# Altium PCB PCB1.PcbDoc (part 3 of 4)
Units mil, origin at the board's own origin, x right, y up, seen from the top; angles counter-clockwise.
Board outline 7000 x 4400 mil, 4 copper layers (Top Layer, Layer 1, Layer 2, Bottom Layer), stack 23.756 mil thick; 175 components, 152 nets, 661 pads, 40 vias.
Unrouted connection lines stored in the file: 277.
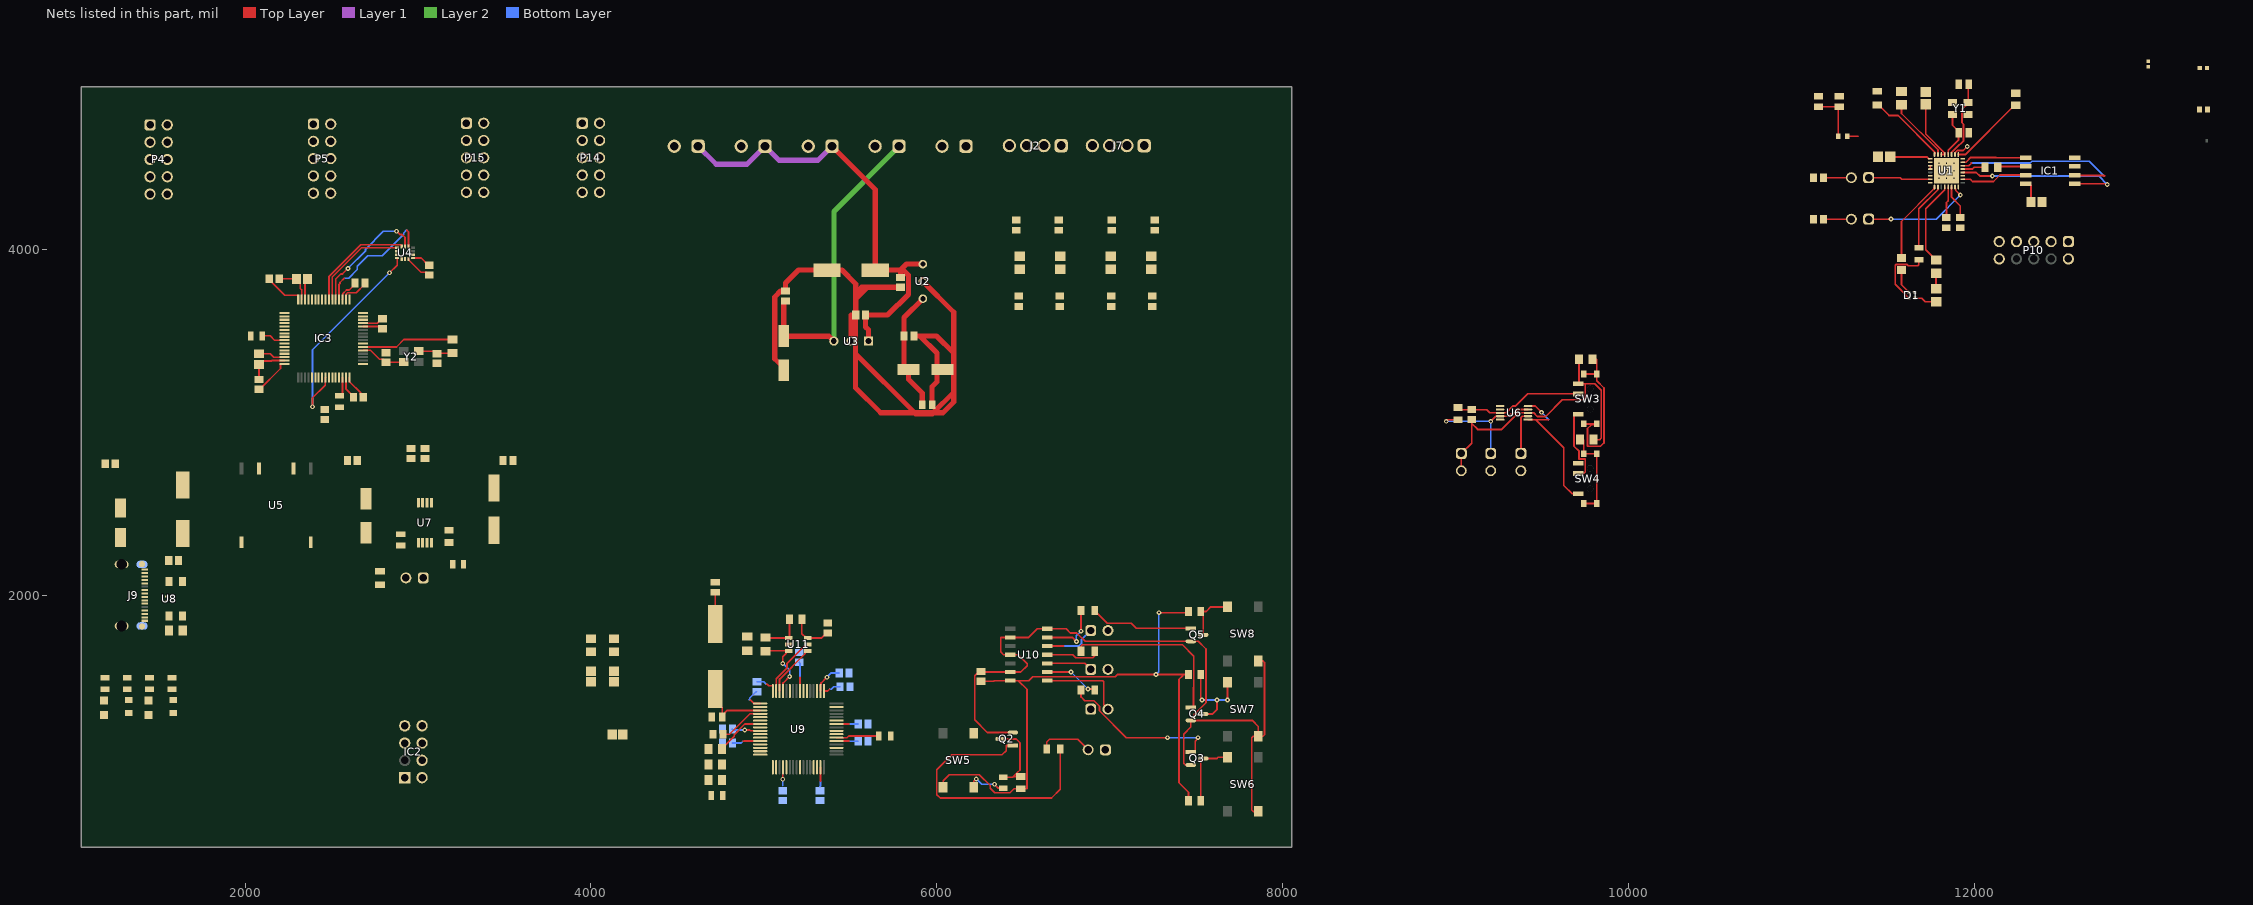
[diagram p4: the nets of this part, all layers, seen from the top]

## Part data (continued)
R12: library part CMP-2001-03692-2, "RES Thick Film, 22Ω, 1%, 0.125W, 100ppm/°C, 0805", Case Code (Imperial)=0805, Case Code (Metric)=2012, Max Operating Temperature=155°C, Max Power Dissipation=125mW, Min Operating Temperature=-55°C, Package Quantity=5000, Resistance=22R, Temperature Coefficient=100ppm/°C, Tolerance=1%, Voltage Rating=150V, Case/Package=0805, Composition="Thick Film", Contact Plating=Tin, Depth=1.25mm, Features="Automotive AEC-Q200", Height=0.45mm, Lead Free="Lead Free", Length=2mm, Military Standard=Not, Mount="Surface Mount", Number of Terminations=2, Packaging="Tape and Reel", Power Rating=125mW, Radiation Hardening=No, Termination=SMD/SMT, Voltage Rating (DC)=150V, Weight=0.000194oz, Width=1.25mm
R13: library part CMP-2001-00211-2, "RES SMD 499 OHM 1% 1/8W 0805", Case Code (Imperial)=0805, Case Code (Metric)=2012, Max Operating Temperature=155°C, Max Power Dissipation=125mW, Min Operating Temperature=-55°C, Package Quantity=1, Resistance=499R, Resistance Tolerance=1%, Resistor Type="Thick Film", Temperature Coefficient=100ppm/°C, Voltage Rating=150V, Case/Package=0805, Construction=Rectangular, Contact Plating=Tin, Depth=1.25mm, Features="Automotive AEC-Q200", Height=0.6mm, Lead Free="Lead Free", Length=2mm, Military Standard=Not, Mount="Surface Mount", Number of Terminations=2, Packaging="Tape and Reel", Power Rating=125mW, Radiation Hardening=No, REACH SVHC="No SVHC", RoHS Compliant=Yes, Series=ERJ, Technology="THICK FILM", Termination=SMD/SMT, Tolerance=1%, Voltage Rating (DC)=150V, Width=0.049inch, Working Voltage=150V
R18 R19 R24 R25: library part CMP-2001-00644-1, Manufacturer=Panasonic, Part Number=ERA6AEB472V
R20 R21 R26 R27: library part CMP-2001-00581-2, "RES 1K OHM 0.1% 1/8W 0805", Case Code (Imperial)=0805, Case Code (Metric)=2012, Max Operating Temperature=155°C, Max Power Dissipation=125mW, Min Operating Temperature=-55°C, Package Quantity=5000, Resistance=1kR, Resistance Tolerance=0.1%, Resistor Type="Thin Film", Temperature Coefficient=25ppm/°C, Voltage Rating=100V, Case/Package=0805, Construction=Rectangular, Contact Plating=Tin, Depth=1.25mm, Height=0.5mm, Length=2mm, Military Standard=Not, Mount="Surface Mount", Number of Pins=2, Number of Terminations=2, Packaging="Tape and Reel", Power Rating=125mW, Radiation Hardening=No, REACH SVHC="No SVHC", RoHS Compliant=Yes, Series=ERA-6A, Technology="THIN FILM", Termination=SMD/SMT, Tolerance=0.1%, Width=1.25mm, Working Voltage=100V
R31 R36 R44 R49 R56 R57 R60: library part CMP-1659-00013-4, "Chip Resistor, 10 KOhm, +/- 1%, 0.125 W, -55 to 155 degC, 0805 (2012 Metric), RoHS, Tape and Reel", Manufacturer=Yageo, Max Operating Temperature="155 degC", Min Operating Temperature="-55 degC", Package Quantity=5000, Voltage Rating="150 V", ComponentLink1Description="Manufacturer URL", ComponentLink1URL=http://www.yageo.com/, ComponentLink2Description=Datasheet, ComponentLink2URL=http://www.yageo.com/documents/recent/PYu-RC_Group_51_RoHS_L_04.pdf, DatasheetVersion="Rev. 4, 02/2016", Height="0.5 mm", Length="2 mm", Mount="Surface Mount", Mounting Technology="Surface Mount", PackageDescription="2-Pin Surface Mounted Device, Body 2 x 1.25 mm", PackageReference=0805, Packaging="Tape and Reel", Pins=2, REACH SVHC="No SVHC", RoHSCompliant=true
R37: library part CMP-2001-03961-1, Manufacturer="Vishay Dale", Part Number=CRCW08054K30FKEA
R38 R45: library part CMP-2000-06961-1, "Chip Resistor, 470 Ohm, +/- 1%, 125 mW, -55 to 155 degC, 0805 (2012 Metric), RoHS, Tape and Reel", Manufacturer=Yageo, Package Description="2-Pin Surface Mounted Device, Body 2 x 1.25 mm", Package Reference=0805, Power Rating=250mW, Resistance=470ohm, Resistance Tolerance=±1%, Resistor Case Style=0805[2012Metric], Resistor Element Type=ThickFilm, Temperature Coefficient=±100ppm/°C, Voltage Rating=150V, Automotive Qualification Standard=-, Datasheet URL=http://www.yageo.com/documents/recent/PYu-RC_Group_51_RoHS_L_7.pdf, Datasheet Version="Rev. 7, 05/2017", Manufacturer URL=http://www.yageo.com/, Mounting Technology=SurfaceMount, MSL=MSL1-Unlimited, Packaging=Tape&Reel, Product Range=-, SVHC=ToBeAdvised
R39 R43: library part CMP-03211-010210-1, "SMD Chip Resistor, Thin Film, 5.11KΩ, 100 V, 0805 [2012 Metric], 100 mW, 0.1%, RN73 Series", Manufacturer="TE Connectivity", Package=RN732A, Power Rating=0.1W, Resistance=5.11KΩ, Temperature="-55°C to 155°C", Temperature Coefficient=10ppm/°C, Temperature Range High=155°C, Temperature Range Low=-55°C, Tolerance=0.1%, Voltage Rating=100V, Automotive=No, Category=Res, ComponentLink2Description=Datasheet, ComponentLink2URL=https://www.te.com/commerce/DocumentDelivery/DDEController?Action=showdoc&DocId=Data+Sheet%7F1773270%7FP%7Fpdf%7FEnglish%7FENG_DS_1773270_P.pdf%7F1676162-2, Composition="Thin Film", Device Class L1="Passive Components", Device Class L2=Resistors, Device Class L3="Chip SMD Resistors", Height=0.65mm, Ipc Land Pattern Name=RESC200125X55, Lead Free=Yes, Manufacturer Part Number=RN73C2A5K11BTDF, Octopart=https://octopart.com/rn73c2a5k11btdf-te+connectivity-41219646, octopart_url=https://octopart.com/rn73c2a5k11btdf-te+connectivity-41219646, Packaging="1000 Reel", RoHS=TRUE, Series=RN73
R40 R41 R47: library part CMP-2100-03673-1, "Chip Resistor, 0 Ohm, Jumper, +/- 5%, 0.125 W, -55 to 155 degC, 0805 (2012 Metric), RoHS, Tape and Reel", Case Code (Imperial)=0805, Case Code (Metric)=2012, Manufacturer=Yageo, Max Operating Temperature=155degC, Min Operating Temperature=-55degC, Package Description="2-Pin Surface Mounted Device, Body 2 x 1.25 mm", Power Rating=125mW, Resistance=0mOhm, Temperature Coefficient=200ppm/degreesC, Tolerance=5%, Voltage Rating=150V, Case/Package=0805, Composition=ThickFilm, Contact Plating=Tin, Datasheet URL=http://www.yageo.com/NewPortal/yageodocoutput?fileName=/pdf/R-Chip/PYu-RC_Group_51_RoHS_L_5.pdf, Datasheet Version="Rev. 5, 10/2016", Depth=1.25mm, Height=0.5mm, Lead Free=LeadFree, Length=2mm, Manufacturer URL=http://www.yageo.com/, Military Standard=Not, Number of Pins=2, Package Reference=0805, Packaging=TapeandReel, Radiation Hardening=No, REACH SVHC=Unknown, RoHSCompliant=true, Termination=SMD/SMT, Voltage Rating (DC)=150V, Width=1.25mm
R42: library part CMP-2001-03615-2, "RES Thick Film, 1.5kΩ, 1%, 0.125W, 100ppm/°C, 0805", Case Code (Imperial)=0805, Case Code (Metric)=2012, Max Operating Temperature=155°C, Max Power Dissipation=125mW, Min Operating Temperature=-55°C, Package Quantity=10, Resistance=1.5kR, Temperature Coefficient=100ppm/°C, Tolerance=1%, Voltage Rating=150V, Case/Package=0805, Composition="Thick Film", Contact Plating=Tin, Depth=1.25mm, Features="Automotive AEC-Q200", Height=0.45mm, Lead Free="Lead Free", Length=2mm, Military Standard=Not, Number of Terminations=2, Packaging="Tape and Reel", Power Rating=125mW, Radiation Hardening=No, Termination=SMD/SMT, Voltage Rating (DC)=150V, Weight=0.000194oz, Width=0.049inch
R46 R50 R58 R61: library part CMP-03211-000756-1, "SMD Chip Resistor, Thin Film, 100Ω, 100 V, 0805 [2012 Metric], 100 mW, 0.1%, RN73 Series", Manufacturer="TE Connectivity", Package=RN732A, Power Rating=0.1W, Resistance=100Ω, Temperature="-55°C to 155°C", Temperature Coefficient=10ppm/°C, Temperature Range High=155°C, Temperature Range Low=-55°C, Tolerance=0.1%, Voltage Rating=100V, Automotive=No, Category=Res, ComponentLink2Description=Datasheet, ComponentLink2URL=https://www.te.com/commerce/DocumentDelivery/DDEController?Action=showdoc&DocId=Data+Sheet%7F1773270%7FP%7Fpdf%7FEnglish%7FENG_DS_1773270_P.pdf%7F1676162-2, Composition="Thin Film", Device Class L1="Passive Components", Device Class L2=Resistors, Device Class L3="Chip SMD Resistors", Height=0.65mm, Ipc Land Pattern Name=RESC200125X55, Lead Free=Yes, Manufacturer Part Number=RN73C2A100RBTDF, Octopart=https://octopart.com/rn73c2a100rbtdf-te+connectivity-41188433, octopart_url=https://octopart.com/rn73c2a100rbtdf-te+connectivity-41188433, Packaging="1000 Reel", RoHS=TRUE, Series=RN73
R51 R52: library part CMP-2100-03670-1, "Chip Resistor, 10 Ohm, +/- 1%, 0.125 W, -55 to 155 degC, 0805 (2012 Metric), RoHS, Tape and Reel", Case Code (Imperial)=0805, Case Code (Metric)=2012, Manufacturer=Yageo, Max Operating Temperature=155degC, Max Power Dissipation=125mW, Min Operating Temperature=-55degC, Package Description="2-Pin Surface Mounted Device, Body 2 x 1.25 mm", Package Quantity=1, Resistance=10Ohm, Temperature Coefficient=200ppm/degreesC, Tolerance=1%, Voltage Rating=150V, Case/Package=0805, Composition=ThickFilm, Datasheet URL=http://www.yageo.com/NewPortal/yageodocoutput?fileName=/pdf/R-Chip/PYu-RC_Group_51_RoHS_L_5.pdf, Datasheet Version="Rev. 5, 10/2016", Depth=1.25mm, Height=0.5mm, Lead Free=LeadFree, Length=2mm, Manufacturer URL=http://www.yageo.com/, Number of Pins=2, Number of Terminations=2, Package Reference=0805, Packaging=TapeandReel, Power Rating=125mW, REACH SVHC=NoSVHC, RoHSCompliant=true, Termination=SMD/SMT, Voltage Rating (DC)=150V, Width=1.25mm
R53: library part CMP-2100-03671-1, "Chip Resistor, 1 KOhm, +/- 1%, 125 mW, -55 to 155 degC, 0805 (2012 Metric), RoHS, Tape and Reel", Case Code (Imperial)=0805, Case Code (Metric)=2012, Manufacturer=Yageo, Max Operating Temperature=155degC, Max Power Dissipation=125mW, Min Operating Temperature=-55degC, Package Description="2-Pin Surface Mounted Device, Body 2 x 1.25 mm", Package Quantity=1, Resistance=1KOhm, Temperature Coefficient=100ppm/degreesC, Tolerance=1%, Voltage Rating=150V, Case/Package=0805, Composition=ThickFilm, Datasheet URL=http://www.yageo.com/NewPortal/yageodocoutput?fileName=/pdf/R-Chip/PYu-RC_Group_51_RoHS_L_5.pdf, Datasheet Version="Rev. 5, 10/2016", Depth=1.25mm, Height=0.024inch, Lead Free=LeadFree, Length=0.079inch, Manufacturer URL=http://www.yageo.com/, Military Standard=Not, Number of Pins=2, Number of Terminations=2, Package Reference=0805, Packaging=TapeandReel, Power Rating=125mW, REACH SVHC=Unknown, RoHSCompliant=true, Termination=SMD/SMT, Voltage Rating (DC)=150V, Width=0.049inch
R55: library part CMP-2001-04934-2, "RES Thick Film, 12kΩ, 1%, 0.125W, 100ppm/°C, 0805", Case Code (Imperial)=0805, Case Code (Metric)=2012, Max Operating Temperature=155°C, Max Power Dissipation=125mW, Min Operating Temperature=-55°C, Package Quantity=10, Resistance=12kR, Temperature Coefficient=100ppm/°C, Tolerance=1%, Voltage Rating=150V, Case/Package=0805, Composition="Thick Film", Contact Plating=Tin, Depth=1.25mm, Features="Automotive AEC-Q200", Height=0.45mm, Lead Free="Lead Free", Length=2mm, Military Standard=Not, Mount="Surface Mount", Number of Terminations=2, Packaging="Tape and Reel", Power Rating=125mW, Radiation Hardening=No, Termination=SMD/SMT, Voltage Rating (DC)=150V, Weight=0.000194oz, Width=0.049inch
R59: library part CMP-2001-01361-1, Manufacturer=Yageo, Part Number=RC0805JR-072KL
R62: library part CMP-009-00007-5, "Chip Resistor, 0 Ohm, 0.125 W, -55 to 155 degC, 0805 (2012 Metric)", Case/Package=0805, Max Operating Temperature=155°C, Min Operating Temperature=-55°C, Power=125mW, Tolerance=5%, Voltage Rating=50V, Mounting Technology=SM, Pins=2, RoHS Compliant=True
SW3 SW4: library part CMP-2000-06884-2, "SWITCH SLIDE SPDT 300MA 6V", Contact Current Rating=300mA, Contact Resistance=70mR, Insulation Resistance=100mR, Max Operating Temperature=85°C, Max Voltage Rating (DC)=6V, Min Operating Temperature=-20°C, Package Quantity=1, Actuator Length=1.5mm, Actuator Material=Nylon, Actuator Type=Standard, Contact Material="Copper Alloy", Contact Plating=Silver, Current Rating=300mA, Depth=5mm, Lead Free="Lead Free", Length=7.7mm, Max Current Rating=300mA, Mechanical Life=10000Cycles, Mount="Surface Mount", Orientation="Right Angle", Packaging="Tape and Reel", REACH SVHC="No SVHC", Switch Function=On-On, Switch Travel=1.5mm, Termination="Gull Wing", Throw Configuration=SPDT, Voltage Rating (AC)=6V, Voltage Rating (DC)=6V, Width=6.7mm
SW5 SW6 SW7 SW8: library part CMP-2000-05160-2, "SWITCH TACTILE SPST-NO 0.05A 12V", Case/Package=SMD/SMT, Color=Black, Contact Resistance=100mR, Current Rating=50mA, Max Operating Temperature=60°C, Max Voltage Rating (DC)=12V, Min Operating Temperature=-20°C, Operating Force=160gf, Package Quantity=1, Actuator Length=0.85mm, Actuator Material=Nylon, Actuator Type=Standard, Contact Material=Silver, Contact Plating=Silver, Depth=9mm, Illumination Type=Non-Illuminated, Lead Free="Lead Free", Length=6mm, Max Current Rating=50mA, Mechanical Life=100000Cycles, Mount="Surface Mount", Orientation=Straight, Packaging="Tape and Reel", REACH SVHC="No SVHC", Switch Function=Off-Mom, Termination="Gull Wing", Throw Configuration=SPST, Voltage Rating (DC)=12V
U1: library part CMP-2000-07453-1, "Low-Power, Highly-Integrated Wi-Fi Solution, 2.5 to 3.6 V, 80 mA, -40 to 125 degC, 32-Pin QFN", Manufacturer="Espressif Systems", Package Description="32-Pin Quad Falt No-Lead, Body 5 x 5 mm, Pitch 0.5 mm", Package Reference=QFN-32, Datasheet URL=http://espressif.com/sites/default/files/documentation/0a-esp8266ex_datasheet_en.pdf, Datasheet Version="Rev. 5.4, 04/2017", Manufacturer URL=http://espressif.com, Mounting Technology=SurfaceMount
U2: library part CMP-2000-05426-2, Case/Package=SIP, Max Input Voltage=36V, Max Input Voltage (DC)=32V, Max Operating Temperature=85°C, Max Output Current=1A, Max Output Power=3.3W, Min Input Voltage=4.75V, Min Input Voltage (DC)=5.5V, Min Operating Temperature=-40°C, Nominal Output Voltage=3.3V, Nominal Supply Current=1mA, Switching Frequency=500kHz, Depth=7.6mm, Efficiency=79%, Height=10.2mm, Isolation=Isolated, Length=11.7mm, Max Supply Voltage=36V, Min Supply Voltage=4.75V, Mount="Through Hole", NexarPartId=9539342, Number of Outputs=1, Number of Pins=3, Output Current=1A, Output Power=3.3W, Output Type=Fixed, Output Voltage=3.3V, Power Rating=3.3W, Radiation Hardening=No, REACH SVHC="No SVHC", RoHS=Compliant, Weight=1.9g, Width=7.6mm
U3: library part CMP-2000-05427-1, "DC/DC converter, 5 VDC, 1000 mA, -40 to 85 degC, 3-Pin SIP, RoHS", Input Voltage DC Max=36V, Input Voltage DC Min=6.5V, Manufacturer=Tracopower, Output Current Max=1A, Output Power Max=5W, Output Voltage Nom.=5V, Package Description="3-Pin Single In-line Package, Body 11.7 x 7.6 mm, Pitch 2.54 mm", Package Reference=SIP-3, Approvals & Standards=IEC,UL, Datasheet URL=https://datasheet.ciiva.com/6815/tsr1-6815641.pdf, Datasheet Version=Jan-15, DC / DC Converter Mounting=ThroughHole, DC / DC Converter Output Type=Fixed, DC / DC Converter Type=SIP, Depth=11.7mm, Height=10.2mm, Manufacturer URL=http://www.tracopower.com/home, No. of Outputs=1Output, Product Range=TSR-1Series, Width=7.6mm
U4: library part CMP-12177-000010-1, "INEMO INERTIAL MODULE: 3D ACCELE", Manufacturer=STMicroelectronics, Max Supply Voltage=3.6V, Min Supply Voltage=1.62V, Operating Supply Current=0.55mA, Package=LGA-14L-DM00249496, Temperature="-40°C to +85°C", Temperature Range High=+85°C, Temperature Range Low=-40°C, Accel Range=2/4/8/16g, Accel Sensitivity=0.061/0.122/0.244/0.488mV/g, Automotive=No, Category=IC, ComponentLink2Description=Datasheet, ComponentLink2URL=https://www.st.com/resource/en/datasheet/lsm6dsox.pdf, Device Class L1=Sensors, Device Class L2="Motion Sensors", Device Class L3="Inertial Measurement Units (IMUs)", Digikey Description="INEMO INERTIAL MODULE: 3D ACCELE", Footprint Url=https://www.st.com/content/ccc/resource/technical/document/technical_note/73/17/9c/16/dd/96/4a/01/CD00134799.pdf/files/CD00134799.pdf/jcr:content/translations/en.CD00134799.pdf, Gyro Range=125/250/500/1000/2000°/s, Gyro Sensitivity=4.375/8.75/17.5/35/70LSB/°/s, Height=0.86mm, Lead Free=Yes, Manufacturer Part Number=LSM6DSOXTR, Mouser Description="LSM6DSOX: 3.6 V 3 Axis Accelerometer Gyroscope iNEMO Inertial Module - LGA-14L", Octopart=https://octopart.com/lsm6dsoxtr-stmicroelectronics-98102600, RoHS=TRUE, Sensor Output=I2C,SPI,Other, Sensor Type=Temperature,Accelerometer,Gyroscope
U5: library part CMP-01539-55433846-1, "TSRN 1-2433SM Non Isolated Board Mount Dc/dc Converter, Surface Mount Dip, 5.5 W, 1.5 V, 5.5 V, 1 A, 4.6 V Rohs Compliant: Yes", Case/Package=SMD/SMT, Max Input Voltage=42V, Max Operating Temperature=85°C, Max Output Current=1A, Max Output Power=5.5W, Max Output Voltage=5.5V, Min Input Voltage=4.6V, Min Operating Temperature=-40°C, Min Output Voltage=1.5V, Output Voltage=3.3V, Depth=15.2mm, Efficiency=80%, Height=7mm, Isolation=Non-Isolated, Length=15.2mm, Max Input Voltage (DC)=42V, Min Input Voltage (DC)=4.6V, Mount="Surface Mount", NexarPartId=55433846, Number of Outputs=1, Number of Pins=6, Output Current=1A, Output Power=5.5W, REACH SVHC="No SVHC", RoHS=Compliant, Weight=1.7kg, Width=9.3mm
U6: library part CMP-04892-000058-1, "IC SWITCH DUAL SPDT 10MSOP", Case/Package=VSSOP, High Level Output Current=50mA, Max Operating Temperature=85°C, Max Supply Current=1uA, Max Supply Voltage=5.5V, Min Operating Temperature=-40°C, Min Supply Voltage=1.8V, On-State Resistance=10R, Package Quantity=1, Bandwidth=220MHz, Contact Plating=Gold, Height=1.02mm, Lead Free="Lead Free", Length=3mm, Low Level Output Current=50mA, Mount="Surface Mount", Number of Bits=2, Number of Channels=2, Number of Inputs=2, Number of Outputs=4, Number of Pins=10, Operating Supply Current=1uA, Packaging="Tape and Reel", Polarity=Non-Inverting, Radiation Hardening=No, Series=-, Supply Type=Single, Throw Configuration=SPDT, Turn-Off Delay Time=3.8ns, Turn-On Delay Time=5.7ns, Weight=0.000663oz, Width=3mm
U7: library part CMP-0339-00043-2, "Dual In / Single Out Autoswitching Power Mux, 2.8 to 5.5 V, -40 to 85 degC, 8-pin TSSOP (PW), Green (RoHS & no Sb/Br)", IN1 Output Current(Max)(A)=1.25, IN1, IN2 Input Voltage(Max)(V)=5.5, IN1, IN2 Input Voltage(Min)(V)=2.8, Manufacturer="Texas Instruments", Code_JEDEC=MO-153, ComponentLink1Description=Datasheet, ComponentLink1URL=http://www.ti.com/general/docs/lit/getliterature.tsp?genericPartNumber=TPS2113A&fileType=pdf, DatasheetVersion=SBVS045C, Eco-Plan="Green (RoHS & no Sb/Br)", IN1 rDS(on)(Typ)(mOhm)=84, IN2 Output Current(Max)(A)=1.25, IN2 rDS(on)(Typ)(Ohms)=0.084, Mounting Technology="Surface Mount", Number of Inputs=2, PackageDescription="8-Pin Plastic Thin Small Outline Package 3 x 4.4 mm Body ,0.65 mm Pitch", PackageReference=PW0008A, PackageVersion="revG, Feb-2011", PartNumber=TPS2113APW, SubFamily="Power Multiplexer (MUX)"
U8: library part CMP-0326-00046-3, "ESD Solution for Super-Speed (6 Gbps) USB 3.0 Interface, 2 Channels, -40 to +85 degC, 3-pin SOT (DRT), Green (Rohs & No Sb/Br)", Breakdown Voltage(Min)(V)=9, Differential Capacitance(pF)=0.01, IO Capacitance(Typ)(pF)=0.7, IO Leakage Current(nA)=10, Manufacturer="Texas Instruments", 1394 / Firewire=TRUE, ComponentLink1Description=Datasheet, ComponentLink1URL=http://www.ti.com/general/docs/lit/getliterature.tsp?genericPartNumber=TPD2EUSB30&fileType=pdf, ComponentLink2Description="URL Link1", ComponentLink2URL=SamplesURL:http://www.ti.com/product/tpd2eusb30#samples, DatasheetVersion=SLVSAC2C, Eco-Plan="Green (RoHS & no Sb/Br)", HDMI=TRUE, IEC 61000-4-2 Air-Gap(+/- kV)=8, IEC 61000-4-2 Contact(+/- kV)=8, Mounting Technology="Surface Mount", PackageDescription="3-Flat Lead Plastic Small Outline, 1 x 1 mm (inc leads), 0.35 mm Pitch", PackageReference=DRT0003A, PackageVersion="revD, Jun-2008", PartNumber=TPD2EUSB30DRTR, Serial ATA / eSATA=TRUE, SubFamily="ESD Solution", USB Full Speed=TRUE, USB High Speed=TRUE, USB Super Speed=TRUE
U9: library part CMP-0078-00023-3, "Dual High Speed USB To Multipurpose UART/FIFO IC, 64-pin LQFP, Tape and Reel", Manufacturer=FTDI, ComponentLink1Description="Manufacturer URL", ComponentLink1URL=http://www.ftdichip.com/, ComponentLink2Description=Datasheet, ComponentLink2URL=http://www.ftdichip.com/Support/Documents/DataSheets/ICs/DS_FT2232H.pdf, DatasheetVersion="ver 2.21, Jun-2012", PackageDescription="64-Pin Thin Quad Flat Pack, 10 x 10 x 1.4 mm Body, 0.5 mm Pitch", PackageReference=LQFP-64, PackageVersion=Jun-12, PartNumber=FT2232HL-Reel, RevisionNote="DatasheetVersion updated to 2.21 Jun-2012"
U10: library part CMP-1615-00149-4, "IC INVERTER SCHMITT 6CH 14SOIC", Manufacturer="TEXAS INSTRUMENTS", Max Supply Voltage=3.6V, Min Supply Voltage=1.65V, Nominal Supply Current=1uA, Package=D0014A, Temperature="-40°C to +125°C", Temperature Range High=+125°C, Temperature Range Low=-40°C, Automotive=No, Category=IC, ComponentLink2Description=Datasheet, ComponentLink2URL=https://www.ti.com/lit/gpn/SN74LVC14A, Device Class L1="Integrated Circuits (ICs)", Device Class L2="Logic ICs", Device Class L3="Logic Gates", Digikey Description="IC INVERTER SCHMITT 6CH 14SOIC", Height=1.75mm, Lead Free=Yes, Logic Function Desc=Inverting, Manufacturer Part Number=SN74LVC14AD, Mouser Description="In a Pack of 10, Texas Instruments SN74LVC14AD, Hex Schmitt Trigger CMOS Inverter, 14-Pin SOIC", Number Of Circuits=6, Number of Inputs=1, Number of Outputs=1, Octopart=https://octopart.com/sn74lvc14ad-texas+instruments-22854, Propagation Delay=3.2ns, RoHS=TRUE, Standoff Height=0.1mm
U11: library part CMP-0162-00356-2, "IC EEPROM 2K SPI 2MHZ SOT23-6", Case/Package=SOT-23, Frequency=2MHz, Max Operating Temperature=85°C, Max Supply Voltage=5.5V, Min Operating Temperature=-40°C, Min Supply Voltage=2.5V, Nominal Supply Current=2mA, Package Quantity=3000, Access Time=250ns, Contact Plating=Tin, Density=2Kb, Height=1.3mm, Interface=Serial, Lead Free="Lead Free", Length=3.1mm, Max Frequency=2MHz, Memory Size=2Kb, Memory Type=EEPROM, Mount="Surface Mount", Number of Pins=6, Packaging="Tape and Reel", Radiation Hardening=No, REACH SVHC="No SVHC", Width=1.8mm
Y1: library part CMP-27762-002739-1, "Crystal 26MHz ±10ppm 10pF SMD-4 3.2mm x 2.5mm", Case/Package=CSMD, ESR (Equivalent Series Resistance)=50R, Frequency=26MHz, Frequency Stability=10ppm, Load Capacitance=10pF, Max Operating Temperature=60°C, Min Operating Temperature=-10°C, Operating Frequency="26 MHz", Package Quantity=1000, Resistor Type=Ceramic, Depth=2.5mm, Frequency Tolerance=10ppm, Height=0.031inch, Lead Free="Lead Free", Length=3.2mm, Mount="Surface Mount", Number of Pins=4, Packaging="Tape and Reel", REACH SVHC="No SVHC", Series=ABM8, Series Resistance=50R, Termination=SMD/SMT, Tolerance=10ppm, Width=2.5mm
Y2: library part CMP-27762-015716-1, "Crystal 24MHz ±20ppm (Tol) ±50ppm (Stability) 12pF FUND 50Ω Automotive 4-Pin Ultra Mini-CSMD T/R", Case/Package=SMD/SMT, ESR (Equivalent Series Resistance)=50R, Frequency=24MHz, Frequency Stability=50ppm, Frequency Tolerance=20ppm, Load Capacitance=12pF, Max Operating Temperature=125°C, Min Operating Temperature=-40°C, Ratings=AEC-Q200, Height=0.031inch, Length=0.126inch, Mount="Surface Mount", Packaging="Cut Tape", RoHS Compliant=Yes, Series=ABM8AIG, Width=0.098inch
Y3: "Crystal or Oscillator", Manufacturer_Name=ABRACON, Mouser Part Number=815-ABLS2-12-B4YT, Datasheet Link=https://abracon.com/Resonators/abls.pdf, Manufacturer_Part_Number=ABLS2-12.000MHZ-B4Y-T, Mouser Price/Stock=https://www.mouser.co.uk/ProductDetail/ABRACON/ABLS2-12000MHZ-B4Y-T?qs=DZ%2FvJMgWWIs6Scm%252BixQ6gw%3D%3D

## Via types
v1: diameter 28, hole 12, Top Layer to Bottom Layer, 30 vias
v2: diameter 19.68, hole 7.87, Top Layer to Bottom Layer, 9 vias
v3: diameter 15, hole 10, Top Layer to Bottom Layer, 1 vias

## Nets (pads, with @x,y where several pads share a name; then routed paths per layer and width w, separated by ;. In a path a pad name is that pad's centre, name@x,y a point inside that pad or via, vN(x,y) a via of type N, cw(c..) or ccw(c..) an arc to the next point about the centre after c; other vN are vias at no path point)
3V3AKKU: C4.1 C11.2 C14.2 C39.2 U2.3 U7.6 | length 718.6
  Top Layer w30: C11.2@5836.57,3305 C11.2@5836,3305 ; C4.1@5916.25,3100.39 5916.25,3169 5836,3249.25 C11.2@5836,3305 ; U2.3@5920,3715 5811.46,3606.46 C14.2@5811.46,3500 5811.46,3400.46 5811,3400 5811,3305 C11.2@5836,3305
3V3BUS: C29.2 C32.2 C38.2 R37.2 U5.5 U7.8 U9.59
5VBUS: C28.2 C30.2 C31.2 C35.2 J9.A4 J9.A9 J9.B4 J9.B9 U5.1
+3V3: C2.1 C5.2 C6.2 C7.1 C8.1 C20.2 C21.2 C22.2 C23.2 C24.2 C27.2 C33.2 C34.2 C37.2 C43.2 C44.2 C45.2 C46.2 C53.2 C54.2 C55.2 D1.1 FB1.1 FB2.1 IC2.1 IC3.1 IC3.13 IC3.19 IC3.32 IC3.48 IC3.64 J8.1 L1.1 P4.1 P4.2 P5.1 P5.2 P10.1 P10.2 P14.9 P14.10 P15.1 P15.2 R4.2 R6.2 R7.2 R8.2 R11.2 R14.2 R15.2 R30.2 R31.2 R32.2 R36.1 R44.2 R49.2 R53.1 R56.2 R57.2 R60.2 SW3.2 SW5.1 U1.1 U1.29 U1.30 U4.5 U4.8 U6.8 U7.7 U9.20 U9.31 U9.42 U9.50 U9.56 U10.14 U11.6 | length 7334.5
  Top Layer w10: C24.2@2080,3191.46 2084.92,3191.46 2205.06,3311.59 2205.06,3336.46 2205.96,3337.36 IC3.48@2229.09,3337.36 ; C23.2@2140,3830 2140,3825.08 2230.14,3734.94 2306.46,3734.94 2307.36,3734.04 IC3.32@2307.36,3710.91 ; IC3.19@2563.27,3710.91 2564.17,3711.81 2564.17,3742.74 2586.38,3764.94 2601.32,3764.94 2636.46,3800.08 C21.2@2636.46,3805 ; IC3.64@2602.64,3259.09 2602.64,3235.96 2667.87,3170.73 2667.87,3160.44 C27.2@2683.54,3144.77 ; IC3.13@2680.91,3573.58 2765.12,3573.58 2790.08,3598.54 C20.2@2795,3598.54 ; U4.8@2970.77,3950.47 3018.15,3950.47 3060.08,3908.54 C22.2@3065,3908.54 ; v1(5109.61,935.59) 5109.61,964.59 5110.68,965.66 5110.68,1004.77 U9.20@5111.02,1005.12 ; U9.56@5209.45,1446.06 5209.53,1446.14 5209.53,1525.51 ; R56.2@5220.04,1860.59 5220.04,1777.83 5244.88,1752.99 U11.6@5254.72,1752.99 5335.63,1752.99 5364.68,1782.05 C55.2@5369.61,1782.05 ; 5327.35,923.33 5329.61,925.59 5327.9,927.29 5327.9,1004.77 U9.31@5327.56,1005.12 ; U9.50@5327.56,1446.06 5327.56,1481.99 5331.34,1485.77 5331.34,1492.32 v1(5364.61,1525.59) ; U9.42@5420.08,1255.12 5420.31,1255.35 5494.37,1255.35 ; SW5.1@6037.01,889.41 6037.01,926.91 6072.01,961.91 6246.59,961.91 6309.31,899.19 6309.31,883.38 6334.78,857.91 6424.02,857.91 6446.59,880.47 R44.2@6485.59,880.47 6522.59,880.47 6522.59,1454.91 6471.59,1505.91 ; C54.2@6255.59,1502.36 6330.05,1502.36 6333.59,1505.91 U10.14@6425.59,1505.91 6471.59,1505.91 ; v1(7284.59,1898.91) 7456.48,1898.91 R60.2@7456.48,1905.91 ; R49.2@7456.48,810.91 7456.48,859.91 7401.59,914.8 7401.59,1512.91 7422.59,1533.91 7422.59,1540.91 ; R57.2@7456.48,1540.91 7422.59,1540.91 ; R31.2@9014.09,3085.32 9021.09,3085.32 9021.09,3073.43 C33.2@9094.09,3073.43 9180.55,3073.43 9199.09,3054.88 U6.8@9258.35,3054.88 9293.1,3054.88 9332.97,3094.75 9347.96,3094.75 9417.62,3164.41 SW3.2@9710.67,3164.41 ; C7.1@11100,4825.45 C8.1@11220,4825.45 11213.92,4819.37 L1.1@11213.92,4654.99 ; C5.2@11515.43,4534.98 11726.69,4534.98 11737.8,4523.88 U1.1@11746.5,4523.88 ; C6.2@11720,4839.55 11720,4667.34 11830.16,4557.19 U1.29@11830.16,4548.48 U1.30@11810.47,4548.48 ; 6471.59,1505.91 6531.59,1505.91 6554.59,1528.91 7031.59,1528.91 7043.59,1540.91 v1(7268.59,1540.91) 7422.59,1540.91
  Bottom Layer w10: 5109.61,899.13 v1(5109.61,935.59) ; C53.2@5204.61,1612.05 5209.61,1607.05 5209.61,1525.59 5209.53,1525.51 ; 5324.61,894.13 5327.35,896.87 5327.35,923.33 ; v1(5364.61,1525.59) 5389.61,1550.59 C46.2@5436.06,1550.59 ; 5494.37,1255.35 5494.61,1255.59 C45.2@5546.06,1255.59 ; v1(7268.59,1540.91) 7284.59,1556.91 v1(7284.59,1898.91)
+5V: C15.2 C17.2 J2.3 J3.1 J7.3 U3.3 | length 1797.9
  Top Layer w30: C17.2@5125,3701.46 5115,3701.46 C15.2@5115,3498.43 5115,3498 5377,3498 U3.3@5405,3470
  Layer 2 w30: U3.3@5405,3470 5405,4220.14 J3.1@5781.67,4596.81
+12V: C12.2 C13.2 C16.2 J4.1 J5.1 J6.1 U2.1 U3.1 | length 2702.6
  Top Layer w30: J5.1@5394.45,4596.81 5645,4346.26 C12.2@5645,3880 ; U3.1@5605,3470 5605,3535 5588.54,3551.46 C16.2@5588.54,3620 5716,3620 5836,3740 5836,3850 5806,3880 5790,3880 ; C12.2@5644.53,3880 C12.2@5645,3880 ; C13.2@5790,3838.54 5790,3880 ; U2.1@5920,3915 5825,3915 5790,3880 ; C12.2@5645,3880 5790,3880
  Layer 1 w30: J6.1@4620,4596.81 4724.81,4492 4902.41,4492 J4.1@5007.22,4596.81 5088.04,4516 5313.64,4516 J5.1@5394.45,4596.81
GND: C1.2 C3.1 C4.2 C5.1 C6.1 C7.2 C8.2 C10.1 C11.1 C12.1 C13.1 C14.1 C15.1 C16.1 C17.1 C18.2 C19.2 C20.1 C21.1 C22.1 C23.1 C24.1 C25.1 C26.1 C27.1 C28.1 C29.1 C30.1 C31.1 C32.1 C33.1 C34.1 C35.1 C36.2 C37.1 C38.1 C39.1 C40.1 C41.1 C42.1 C43.1 C44.1 C45.1 C46.1 C47.2 C48.2 C49.1 C50.1 C52.1 C53.1 C54.1 C55.1 C56.2 C57.2 IC1.4 IC2.8 IC3.12 IC3.18 IC3.31 IC3.47 IC3.63 J2.4 J3.2 J4.2 J5.2 J6.2 J7.4 J8.2 J9.A1 J9.A12 J9.B1 J9.B12 L2.1 P4.9 P4.10 P5.9 P5.10 P7.1 P7.2 P10.9 P10.10 P14.1 P14.2 P15.9 P15.10 Q2.2 Q3.2 Q4.2 Q5.2 R3.1 R5.1 R20.1 R21.1 R26.1 R27.1 R38.1 R39.1 R40.1 R41.1 R42.1 R43.1 R47.2 R55.1 SW3.3 SW6.2 SW7.2 SW8.2 U1.33 U2.2 U3.2 U4.2 U4.3 U4.6 U4.7 U5.7 U5.9 U6.3 U7.2 U7.5 U8.3 U9.1 U9.5 U9.10 U9.11 U9.13 U9.15 U9.25 U9.35 U9.47 U9.51 U10.7 U10.9 U10.11 U10.13 U11.2 Y1.2 Y1.4 | length 12816.2
  Top Layer w10: C24.1@2080,3248.54 C18.2@2080,3333.28 2100.68,3353.96 2152.82,3353.96 2155.91,3357.05 IC3.47@2229.09,3357.05 ; C23.1@2197.09,3830 C19.2@2298.28,3830 2318.96,3809.32 2318.96,3774.23 2327.05,3766.14 IC3.31@2327.05,3710.91 ; IC3.63@2582.95,3259.09 2582.95,3193.19 2626.46,3149.69 C27.1@2626.46,3144.77 ; IC3.18@2582.95,3710.91 2582.95,3734.04 2586.73,3737.82 2586.73,3744.08 2592.59,3749.94 2643.41,3749.94 2693.54,3800.08 C21.1@2693.54,3805 ; IC3.12@2680.91,3553.9 2782.56,3553.9 C20.1@2795,3541.46 ; U4.7@2944.69,3944.07 2944.69,3939.64 3017.21,3867.13 3049.33,3867.13 C22.1@3065,3851.46 ; 4918.05,1392.15 4924.78,1392.15 4943.7,1373.23 U9.1@4979.13,1373.23 ; C54.1@6255.59,1559.45 C54.1@6255.59,1555.91 ; Q2.2@6440.59,1205.91 6292.59,1205.91 6219.59,1278.91 6219.59,1534.91 6240.59,1555.91 C54.1@6255.59,1555.91 ; Q3.2@7469.76,1018.5 7438.59,1018.5 7428.59,1028.5 7428.59,1196.91 7469.76,1238.07 Q4.2@7469.76,1276 Q4.2@7488.59,1276 ; SW6.2@7859.17,749.41 7830.59,749.41 7822.59,757.41 7822.59,1176.41 7830.59,1184.41 SW7.2@7859.17,1184.41 ; SW8.2@7859.17,1619.41 7886.59,1619.41 7895.59,1610.41 7895.59,1192.91 7887.09,1184.41 SW7.2@7859.17,1184.41 ; P7.2@9034.09,2719.88 P7.1@9034.09,2819.88 9094.09,2879.88 9094.09,2992.88 ; C33.1@9094.09,3016.34 9094.09,2992.88 ; SW3.3@9710.67,3223.46 SW3.3@9714.72,3223.46 ; R40.1@9714.72,3364.88 SW3.3@9714.72,3223.46 ; R41.1@9798.46,2899.88 9835.09,2899.88 9844.09,2908.88 9844.09,3184.88 9805.51,3223.46 9751.09,3223.46 ; C54.1@6255.59,1555.91 U10.13@6425.59,1555.91 6486.59,1555.91 6523.59,1592.91 6523.59,1602.91 6470.59,1655.91 U10.11@6425.59,1655.91 6386.59,1655.91 6369.59,1672.91 6369.59,1753.91 6371.59,1755.91 U10.9@6425.59,1755.91 6531.59,1755.91 6581.59,1805.91 U10.7@6638.19,1805.91 6748.59,1805.91 6773.19,1781.31 6810.35,1781.31 6858.16,1733.5 Q5.2@7469.76,1733.5 7512.99,1733.5 7557.59,1688.91 7557.59,1378.91 7488.59,1309.91 Q4.2@7488.59,1276 ; Q4.2@7488.59,1276 7824.07,1276 7859.17,1240.91 SW7.2@7859.17,1184.41 ; 9094.09,2992.88 9128.09,2958.88 9268.09,2958.88 9364.09,3054.88 U6.3@9419.84,3054.88 9453.07,3054.88 9474.07,3033.88 9522.09,3033.88 9618.09,3129.88 9739.09,3129.88 9751.09,3141.88 9751.09,3223.46 ; SW3.3@9714.72,3223.46 9751.09,3223.46
  Top Layer w30: C15.1@5115,3301.57 5115,3316 5063,3368 5063,3725 5096.54,3758.54 C17.1@5125,3758.54 5125,3805 5200,3880 C12.1@5365,3880 5451.46,3880 5531.46,3800 5531.46,3746.91 ; U3.2@5505,3470 5505,3620 C16.1@5531,3620 ; C13.1@5790,3781.46 5600,3781.46 ; C14.1@5868.54,3500 5902,3500 ; U2.2@5920,3815 6098,3637 6098,3400 ; C4.2@5973.51,3100.39 5973.51,3206 6002,3234.49 C11.1@6002,3305 ; C11.1@6033.43,3305 C11.1@6002,3305 ; 5531,3397 5531,3470 C16.1@5531,3620 ; 5531,3397 5873,3055 ; 5531,3397 5531,3200 5676,3055 5873,3055 ; C16.1@5531,3620 C16.1@5531.46,3620 5531.46,3712.91 ; C16.1@5531,3620 5531,3712.46 ; 5531,3712.46 5531.46,3712.91 ; 5531,3712.46 5531,3746.46 5531.46,3746.91 ; 5531.46,3712.91 5600,3781.46 ; 5531.46,3712.91 5531.46,3746.91 ; 5531.46,3746.91 5566,3781.46 5600,3781.46 ; 5873,3055 5979,3055 ; 5873,3055 5878,3050 5974,3050 5979,3055 ; 5902,3500 5998,3500 6098,3400 ; 5902,3500 6002,3400 C11.1@6002,3305 ; 5979,3055 6098,3174 ; 5979,3055 6036,3055 6098,3117 6098,3174 ; 6098,3174 6098,3305 6098,3400
  Bottom Layer w10: 4918.05,1392.15 4914.61,1395.59 4918.05,1399.03 4918.05,1405.41 4954.68,1442.05 C42.1@4959.61,1442.05
  other v2: 11796.69,4411.67 11840,4411.67 11883.31,4411.67 11796.69,4454.98 11840,4454.98 11883.31,4454.98 11796.69,4498.29 11840,4498.29 11883.31,4498.29
NetC1_1: C1.1 U1.27 Y1.3 | length 446.3
  Top Layer w10: U1.27@11868.41,4558.47 11868.41,4559.17 11896.5,4587.26 11897.2,4587.26 11938.86,4628.92 11938.86,4722.64 11929.69,4731.81 11929.69,4810.18 11965.28,4845.77 Y1.3@11965.28,4849.43 11965.28,4951.04 C1.1@11969.21,4954.98
NetC2_2: C2.2 IC1.8 | length 129
  Top Layer w10: IC1.8@12298.27,4379.98 12317.95,4379.98 12328.28,4369.66 C2.2@12328.28,4274.98
NetC3_2: C3.2 U1.28 Y1.1 | length 271.7
  Top Layer w10: U1.28@11849.84,4548.48 11849.92,4548.56 11849.92,4573.17 11910.16,4633.41 C3.2@11910.16,4674.98 11910.16,4682.85 11874.72,4718.29 Y1.1@11874.72,4780.53
NetC9_1: C9.1 C10.2
NetC9_2: C9.2 L2.2 U1.2
NetC18_1: C18.1 IC3.46 | length 157.4
  Top Layer w10: C18.1@2080,3396.72 2144.82,3396.72 2164.81,3376.73 IC3.46@2229.09,3376.73
NetC19_1: C19.1 IC3.30 | length 125.3
  Top Layer w10: IC3.30@2346.73,3710.91 2346.73,3815.01 C19.1@2361.72,3830
NetC25_2: C25.2 IC3.5 Y2.1 | length 264.7
  Top Layer w10: IC3.5@2680.91,3416.1 2724.94,3416.1 2776.95,3364.1 2798.35,3364.1 C25.2@2815,3347.44 2915.63,3347.44 Y2.1@2916.69,3348.5
NetC26_2: C26.2 R62.1 Y2.3 | length 202.1
  Top Layer w10: Y2.3@3003.31,3411.5 3096.06,3411.5 3107.56,3400 3200,3400 R62.1@3200,3400.63
NetC36_1: C36.1 C49.2 FB1.2 U9.9 | length 165.1
  Top Layer w10: v1(4889.61,1220.59) 4918.61,1220.59 4923.1,1216.09 4978.79,1216.09 U9.9@4979.13,1215.75
  Bottom Layer w10: C49.2@4818.15,1225.59 4823.15,1220.59 v1(4889.61,1220.59)
NetC47_1: C47.1 C50.2 FB2.2 U9.4 | length 265.1
  Top Layer w10: C50.2@4763.15,1195.59 4801.72,1195.59 4920.31,1314.17 U9.4@4979.13,1314.17
NetC56_1: C56.1 U9.2 Y3.1 | length 183.5
  Top Layer w10: Y3.1@4719.61,1832.6 C56.1@4719.61,2016.06
NetC57_1: C57.1 U9.3 Y3.2 | length 412
  Top Layer w10: Y3.2@4719.61,1458.58 4719.61,1389.68 4759.13,1350.16 C57.1@4759.13,1303.46 ; C57.1@4759.13,1295.59 C57.1@4759.13,1303.46 ; U9.3@4979.13,1333.86 4789.53,1333.86 C57.1@4759.13,1303.46
NetD1_2: D1.2 R9.1 | length 131.8
  Top Layer w10: D1.2@11656.73,3718.26 11696.37,3718.26 11717.04,3697.59 R9.1@11780,3697.59
NetD1_3: D1.3 R12.1 | length 398.4
  Top Layer w10: D1.3@11623.27,3718.26 11543.19,3798.34 11543.19,3907.38 11549.04,3913.24 11610.96,3913.24 11619.44,3904.76 11674.14,3904.76 11680,3910.62 R12.1@11680,3941.49
NetD1_4: D1.4 R13.1 | length 146.7
  Top Layer w10: R13.1@11580,3880.51 11580,3794.99 D1.4@11623.27,3751.72
NetD2_1: D2.1 U9.29
NetD2_2: D2.2 R14.1
NetD3_1: D3.1 U9.54
NetD3_2: D3.2 R32.1
NetDS1_1: DS1.1 R11.1
NetDS1_2: DS1.2 U9.30
NetDS2_1: DS2.1 R15.1
NetDS2_2: DS2.2 U9.55
NetIC1_1: IC1.1 U1.20 | length 1055.9
  Top Layer w10: U1.20@11933.5,4445.14 12011.67,4445.14 12031.82,4424.99 v1(12105,4424.99) ; IC1.1@12581.73,4379.98 12761.22,4379.98 12766.21,4374.99 v1(12770,4374.99)
  Bottom Layer w10: v1(12105,4424.99) 12720,4424.99 v1(12770,4374.99)
NetIC1_2: IC1.2 U1.22 | length 1042.6
  Top Layer w10: U1.22@11933.5,4484.51 11969.64,4484.51 11985.13,4500 ; IC1.2@12581.73,4429.98 12584.23,4427.49 12752.5,4427.49 12755,4424.99 12750,4424.99
  Bottom Layer w10: 11985.13,4500 12324.94,4500 12334.93,4509.99 12665,4509.99 12750,4424.99
NetIC1_3: IC1.3 U1.19
NetIC1_5: IC1.5 U1.23 | length 377.1
  Top Layer w10: U1.23@11933.5,4504.19 11933.58,4504.27 11953.17,4504.27 11980.89,4531.99 12124.83,4531.99 12126.84,4529.98 IC1.5@12298.27,4529.98
NetIC1_6: IC1.6 R2.1 | length 163.9
  Top Layer w10: R2.1@12136.42,4474.98 12141.42,4479.98 IC1.6@12298.27,4479.98
NetIC1_7: IC1.7 U1.18 | length 385.4
  Top Layer w10: U1.18@11933.5,4405.77 11978.11,4405.77 11990.89,4392.99 12112.34,4392.99 12149.33,4429.98 IC1.7@12298.27,4429.98
NetIC2_3: IC2.3 P2.1 Q5.3 R60.1 SW8.3 U1.7 | length 667
  Top Layer w10: Q5.3@7541.42,1770.91 7541.59,1770.91 7541.59,1891.67 R60.1@7527.35,1905.91 7558.09,1905.91 7584.59,1932.4 SW8.3@7682.01,1932.4 ; P2.1@11390,4414.98 11572.13,4414.98 11581.34,4405.77 U1.7@11746.5,4405.77
NetIC2_4: IC2.4 R1.1 U6.6
NetIC2_5: IC2.5 U1.26 U6.10 | length 96.1
  Top Layer w10: U1.26@11889.21,4548.48 11889.21,4557.19 11893.98,4561.95 11893.98,4563.52 11902.72,4572.26 11937.27,4572.26 v1(11960,4594.99)
NetIC2_6: IC2.6 P3.1 Q4.3 R57.1 SW7.3 U1.15 | length 1194.6
  Top Layer w10: R57.1@7527.35,1540.91 7527.35,1400.15 v1(7533.59,1393.91) ; Q4.3@7541.42,1313.41 7597.09,1313.41 7620.59,1336.91 v1(7620.59,1393.91) ; v1(7682.01,1393.91) SW7.3@7682.01,1497.4 ; P3.1@11390,4174.98 v1(11520,4174.98) ; U1.15@11889.21,4361.48 11889.21,4352.78 11893.98,4348.01 11893.98,4341 v1(11920,4314.98)
  Bottom Layer w10: v1(7533.59,1393.91) v1(7620.59,1393.91) v1(7682.01,1393.91) ; v1(11520,4174.98) 11780,4174.98 v1(11920,4314.98)
NetIC2_7: IC2.7 R4.1 U1.14 | length 197.9
  Top Layer w10: U1.14@11869.53,4361.48 11869.53,4301.22 11920,4250.75 R4.1@11920,4184.51
NetIC3_6: IC3.6 R62.2 | length 537.1
  Top Layer w10: IC3.6@2680.91,3435.79 2875.66,3435.79 2919.24,3479.37 R62.2@3200,3479.37
NetIC3_7: IC3.7 P15.3
NetIC3_14: IC3.14 P5.7
NetIC3_15: IC3.15 P5.8
NetIC3_16: IC3.16 P15.7
NetIC3_17: IC3.17 P15.4
NetIC3_20: IC3.20 U4.12 | length 729.4
  Top Layer w10: IC3.20@2543.58,3710.91 2543.58,3798.58 2548.46,3803.46 2548.46,3808.46 2573.44,3833.44 ; 2935,4112.82 2935,4111.21 2944.69,4101.53 U4.12@2944.69,4015.93
  Bottom Layer w10: 2573.44,3833.44 2598.44,3833.44 2648.64,3883.64 2648.64,3903.64 2708.83,3963.83 2793.83,3963.83 2917,4087 2917,4094.82 2935,4112.82
NetIC3_21: IC3.21 U4.13 | length 707.9
  Top Layer w10: IC3.21@2523.9,3710.91 2523.9,3828.9 2552.73,3857.73 2562.73,3857.73 v1(2595,3890) ; v1(2875,4105) 2877.57,4105 2896.79,4085.78 2909.22,4085.78 2925,4070 U4.13@2925,4015.93
  Bottom Layer w10: v1(2595,3890) 2696.72,3991.72 2696.72,4001.72 2800,4105 v1(2875,4105)
NetIC3_22: IC3.22 U4.1 | length 574.5
  Top Layer w10: IC3.22@2504.21,3710.91 2504.21,3840.32 2673.42,4009.53 U4.1@2879.23,4009.53
NetIC3_23: IC3.23 U4.14 | length 635.1
  Top Layer w10: IC3.23@2484.53,3710.91 2484.53,3841.85 2669.09,4026.42 2899.25,4026.42 2905.32,4020.36 U4.14@2905.32,4015.93
NetIC3_24: IC3.24 R16.1 R18.2
NetIC3_25: IC3.25 R17.1 R19.2
NetIC3_26: IC3.26 P15.8
NetIC3_27: IC3.27 P15.6
NetIC3_28: IC3.28 R22.1 R24.2
NetIC3_29: IC3.29 R23.1 R25.2
NetIC3_33: IC3.33 P4.5
NetIC3_34: IC3.34 P4.7
NetIC3_35: IC3.35 P4.6
NetIC3_36: IC3.36 P4.8
NetIC3_37: IC3.37 P14.7
NetIC3_38: IC3.38 P14.8
NetIC3_39: IC3.39 P4.4
NetIC3_40: IC3.40 P4.3
NetIC3_41: IC3.41 R29.1 | length 140.9
  Top Layer w10: R29.1@2098.5,3500 2145.25,3500 2170.09,3475.16 IC3.41@2229.09,3475.16
NetIC3_42: IC3.42 R48.2
NetIC3_43: IC3.43 P14.3
NetIC3_44: IC3.44 P14.6
NetIC3_45: IC3.45 P14.4
NetIC3_53: IC3.53 P5.6
NetIC3_54: IC3.54 P5.4
NetIC3_55: IC3.55 P14.5
NetIC3_56: IC3.56 U4.9
NetIC3_57: IC3.57 U4.4 | length 1263.2
  Top Layer w10: v1(2390,3090) 2390,3141.08 2463.98,3215.06 2463.98,3258.23 IC3.57@2464.84,3259.09 ; v1(2835,3865) 2879.23,3909.23 U4.4@2879.23,3950.47
  Bottom Layer w10: v1(2390,3090) 2390,3420 v1(2835,3865)
NetIC3_58: IC3.58 P5.3
NetIC3_59: IC3.59 P5.5
NetIC3_60: IC3.60 P15.5 SW5.4
NetIC3_61: IC3.61 R30.1 U6.7 | length 1.3
  Top Layer w10: IC3.61@2542.68,3258.19 IC3.61@2543.58,3259.09
NetIC3_62: IC3.62 R28.1 | length 117.5
  Top Layer w10: R28.1@2545,3153.5 2552.39,3153.5 2563.27,3164.37 IC3.62@2563.27,3259.09
NetJ2_1: J2.1 R16.2
NetJ2_2: J2.2 R17.2
NetJ7_1: J7.1 R22.2
NetJ7_2: J7.2 R23.2
NetJ9_1: J9.1 J9.2 J9.3 J9.4 R47.1
NetJ9_A5: J9.A5 R39.2
NetJ9_A6: J9.A6 J9.B6 R52.1 U8.1
NetJ9_A7: J9.A7 J9.B7 R51.1 U8.2
NetJ9_B5: J9.B5 R43.2
NetL1_2: L1.2 U1.3 U1.4 | length 82.5
  Top Layer w10: L1.2@11266.08,4654.99 11328.89,4654.99 ; U1.4@11746.5,4464.82 U1.3@11746.5,4484.51
NetP1_1: P1.1 U6.2 | length 251.4
  Top Layer w10: P1.1@9379.09,2819.88 9379.09,3027.2 9387.09,3035.2 U6.2@9419.84,3035.2
NetP1_2: P1.2 R54.2
NetP2_2: P2.2 R6.1 | length 160.5
  Top Layer w10: R6.1@11129.53,4414.98 P2.2@11290,4414.98
NetP3_2: P3.2 R7.1 | length 160.5
  Top Layer w10: R7.1@11129.53,4174.98 P3.2@11290,4174.98
NetP6_1: P6.1 R28.2 R31.1 U6.4 U6.9 | length 757.7
  Top Layer w10: v1(8947.09,3005.88) 8955.66,3014.45 R31.1@9014.09,3014.45 ; v1(9204.09,3005.88) 9233.41,3035.2 U6.9@9258.35,3035.2 9308.09,3035.2 9322.78,3049.88 9336.09,3049.88 9360.78,3074.57 U6.4@9419.84,3074.57
  Bottom Layer w10: v1(8947.09,3005.88) v1(9204.09,3005.88) P6.1@9204.09,2819.88
NetP6_2: P6.2 U9.39
NetP8_1: P8.1 U9.18
NetP8_2: P8.2 R46.1 | length 311.3
  Top Layer w10: R46.1@6636.22,1110.91 6636.22,1150.91 6652.22,1166.91 6814.59,1166.91 P8.2@6875.59,1105.91
NetP9_1: P9.1 U7.3
NetP9_2: P9.2 R37.1 R42.2
NetP10_3: P10.3 U1.8
NetP10_5: P10.5 U1.16
NetP10_7: P10.7 U1.6
NetP11_1: P11.1 U9.21
NetP11_2: P11.2 U10.1 | length 499.2
  Top Layer w10: U10.1@6638.19,1505.91 6959.59,1505.91 6965.59,1499.91 6965.59,1365.91 P11.2@6990.59,1340.91
NetP12_1: P12.1 U10.3 | length 266.9
  Top Layer w10: U10.3@6638.19,1605.91 6855.59,1605.91 P12.1@6890.59,1570.91
NetP12_2: P12.2 U9.40
NetP13_1: P13.1 U10.5 | length 302.2
  Top Layer w10: U10.5@6638.19,1705.91 6732.59,1705.91
  Bottom Layer w10: 6732.59,1705.91 6733.59,1706.91 6822.94,1706.91 6836.94,1720.91 6836.94,1742.25 P13.1@6890.59,1795.91
NetP13_2: P13.2 U9.43
NetQ2_1: Q2.1 R46.2 | length 1635.7
  Top Layer w10: Q2.1@6440.59,1131.1 6401.59,1131.1 6401.59,1100.91 6377.59,1076.91 6087.59,1076.91 6000.59,989.91 6000.59,846.91 6020.59,826.91 6663.59,826.91 6714.96,878.28 R46.2@6714.96,1110.91
NetQ2_3: Q2.3 R44.1 R45.1 | length 434.3
  Top Layer w10: Q2.3@6368.92,1168.5 6459.59,1168.5 6481.59,1146.5 6481.59,989.4 6464.56,972.37 6443.53,951.34 ; R45.1@6385.59,947.4 6439.59,947.4 6443.53,951.34 ; R44.1@6485.59,951.34 6443.53,951.34
NetQ3_1: Q3.1 R50.2 | length 938.7
  Top Layer w10: R50.2@6834.68,1450.91 6834.68,1411.81 6856.93,1389.57 6909.84,1389.57 6941.62,1357.78 6941.62,1331.19 7096.91,1175.91 v1(7335.59,1175.91) ; Q3.1@7469.76,1093.31 7488.38,1093.31 7494.76,1099.69 7494.76,1155.21 7510.59,1171.04 v1(7510.59,1175.91)
  Bottom Layer w10: v1(7335.59,1175.91) v1(7510.59,1175.91)
NetQ3_3: Q3.3 R49.1 SW6.3 | length 394.6
  Top Layer w10: R49.1@7527.35,810.91 7527.35,1042.67 7540.59,1055.91 Q3.3@7541.42,1055.91 7620.59,1055.91 7627.09,1062.4 SW6.3@7682.01,1062.4
NetQ4_1: Q4.1 R58.2 | length 1023.9
  Top Layer w10: R58.2@6834.68,1675.91 6834.68,1704.91 6842.68,1712.91 7421.59,1712.91 7486.59,1647.91 7486.59,1467.91 7484.59,1465.91 7484.59,1350.81 Q4.1@7469.76,1350.81
NetQ5_1: Q5.1 R61.2 | length 598.8
  Top Layer w10: R61.2@6913.42,1910.91 6986.42,1837.91 7124.59,1837.91 7154.19,1808.31 Q5.1@7469.76,1808.31
NetR1_2: R1.2 U1.25 | length 449.8
  Top Layer w10: U1.25@11908.9,4548.48 11947.6,4548.48 12234.09,4834.98 R1.2@12240,4834.98
NetR2_2: R2.2 U1.21 | length 134.3
  Top Layer w10: U1.21@11933.5,4464.82 11989.98,4464.82 12000.14,4474.98 R2.2@12063.58,4474.98
NetR3_2: R3.2 U1.13 | length 181
  Top Layer w10: R3.2@11840,4184.51 11840,4271.06 11849.84,4280.91 U1.13@11849.84,4361.48
NetR5_2: R5.2 U1.31 | length 375.4
  Top Layer w10: R5.2@11580,4836.59 11580,4786.13 11790.71,4575.42 11790.71,4548.56 U1.31@11790.79,4548.48
NetR8_1: R8.1 U1.32 | length 454.5
  Top Layer w10: R8.1@11440,4835.61 11446.89,4835.61 11507.52,4774.98 11560,4774.98 11775.71,4559.27 U1.32@11775.71,4554.98
NetR9_2: R9.2 R10.1 | length 89.6
  Top Layer w10: R9.2@11780,3772.39 R10.1@11780,3861.95
NetR10_2: R10.2 U1.12 | length 495.5
  Top Layer w10: R10.2@11780,3938.73 11776.06,3938.73 11754.49,3960.3 11754.49,3964.24 11720,3998.73 11720,4234.98 11830.08,4345.06 11830.08,4361.4 U1.12@11830.16,4361.48
NetR12_2: R12.2 U1.10 | length 390.1
  Top Layer w10: R12.2@11680,4008.49 11680,4234.98 11790.71,4345.69 U1.10@11790.71,4352.7
NetR13_2: R13.2 U1.9 | length 491.2
  Top Layer w10: R13.2@11580,3949.45 11580,4161.67 11771.1,4352.78 U1.9@11771.1,4361.48
NetR18_1: R18.1 R20.2
NetR19_1: R19.1 R21.2
NetR24_1: R24.1 R26.2
NetR25_1: R25.1 R27.2
NetR29_2: R29.2 U9.17
NetR36_2: R36.2 U7.1
NetR38_2: R38.2 U7.4
NetR40_2: R40.2 SW3.4 SW3.5 SW3.6 SW3.7 | length 951.4
  Top Layer w10: SW3.4@9741.57,2991.18 9741.57,2990.88 SW3.6@9817.56,2990.88 ; SW3.5@9741.57,3278.58 9741.57,3278.88 SW3.7@9817.56,3278.88 ; R40.2@9793.46,3364.88 9817.56,3364.88 SW3.7@9817.56,3278.88 ; SW3.6@9817.56,2991.18 SW3.6@9817.56,2990.88 ; SW3.6@9817.56,2990.88 9817.56,2986.88 9787.09,2986.88 9764.09,2963.88 9764.09,2860.88 9839.09,2860.88 9859.09,2880.88 9859.09,3198.35 9817.56,3239.88 SW3.7@9817.56,3278.58 SW3.7@9817.56,3278.88
NetR41_2: R41.2 SW4.4 SW4.5 SW4.6 SW4.7 | length 543.8
  Top Layer w10: R41.2@9719.72,2899.88 9741.57,2899.88 SW4.5@9741.57,2818.58 9741.57,2817.88 SW4.7@9817.56,2817.88 ; SW4.4@9741.57,2531.18 9741.57,2530.88 9817.56,2530.88 SW4.6@9817.56,2531.18 SW4.7@9817.56,2817.88 ; SW4.7@9817.56,2818.58 SW4.7@9817.56,2817.88
NetR45_2: R45.2 SW5.3 | length 233.6
  Top Layer w10: SW5.3@6214.17,889.41 6214.17,923.49 v1(6228.59,937.91) ; v1(6333.59,906.91) 6356.09,884.41 R45.2@6385.59,884.41
  Bottom Layer w10: v1(6228.59,937.91) 6259.59,906.91 v1(6333.59,906.91)
NetR48_1: R48.1 U9.16
NetR50_1: R50.1 U10.2 | length 322.8
  Top Layer w10: U10.2@6638.19,1555.91 v1(6776.59,1555.91) ; v1(6874.59,1457.91) 6913.42,1457.91 R50.1@6913.42,1450.91
  Bottom Layer w10: v1(6776.59,1555.91) v1(6874.59,1457.91)
NetR51_2: R51.2 U9.7 | length 287.8
  Top Layer w10: R51.2@4758.98,1110.59 4758.98,1115.51 4828.63,1185.17 4828.63,1193.56 4890.19,1255.12 U9.7@4979.13,1255.12
NetR52_2: R52.2 U9.8
NetR53_2: R53.2 U9.14
NetR54_1: R54.1 U9.38 | length 249.8
  Top Layer w10: U9.38@5420.08,1176.38 5481.45,1176.38 5490.66,1185.59 R54.1@5666.11,1185.59
NetR55_2: R55.2 U9.6
NetR56_1: R56.1 R59.1 U11.1 | length 245.2
  Top Layer w10: R59.1@5009.61,1754.96 5011.57,1752.99 U11.1@5144.49,1752.99 5149.17,1757.68 R56.1@5149.17,1860.59
NetR58_1: R58.1 SW4.3 U10.4 | length 313.4
  Top Layer w10: U10.4@6638.19,1655.91 6787.59,1655.91 6804.59,1638.91 6903.42,1638.91 6913.42,1648.91 R58.1@6913.42,1675.91
NetR59_2: R59.2 U9.61 U11.3 | length 410.7
  Top Layer w10: R59.2@5009.61,1676.22 5011.57,1678.19 U11.3@5134.65,1678.19 ; v1(5109.61,1605.59) 5109.61,1643.31 5127.83,1661.53 5127.83,1671.38 U11.3@5134.65,1678.19 ; U9.61@5111.02,1446.06 5111.37,1446.41 5111.37,1492.35 v1(5149.61,1530.59) ; U11.3@5144.49,1678.19 U11.3@5134.65,1678.19
  Bottom Layer w10: v1(5109.61,1605.59) 5149.61,1565.59 v1(5149.61,1530.59)
NetR61_1: R61.1 U10.6 | length 369.6
  Top Layer w10: U10.6@6638.19,1755.91 6783.59,1755.91 v1(6807.59,1731.91) ; v1(6834.68,1791.91) R61.1@6834.68,1910.91
  Bottom Layer w10: v1(6807.59,1731.91) 6807.59,1764.81 v1(6834.68,1791.91)
NetSW3_1: SW3.1 SW4.2 | length 449.9
  Top Layer w10: SW4.2@9710.67,2704.41 9742.62,2704.41 9751.09,2712.88 9751.09,2787.88 9715.09,2787.88 9715.09,2831.88 9686.09,2860.88 9686.09,3046.3 SW3.1@9710.67,3046.3
NetSW4_1: SW4.1 U6.1 U6.5 | length 826.1
  Top Layer w10: U6.1@9419.84,3015.51 9464.09,3015.51 ; U6.5@9419.84,3094.25 9461.72,3094.25 v1(9498.09,3057.88) ; 9540.46,3015.51 9464.09,3015.51 ; SW4.1@9710.67,2586.3 9675.09,2586.3 9627.09,2634.3 9627.09,2852.51 9464.09,3015.51
  Bottom Layer w10: v1(9498.09,3057.88) 9540.46,3015.51
NetU1_24: U1.24
NetU9_62: U9.62 U11.4 | length 305.6
  Top Layer w10: U9.62@5091.34,1446.06 5091.34,1514.8 5238.07,1661.53 5238.07,1671.38 5244.88,1678.19 U11.4@5254.72,1678.19
NetU9_63: U9.63 U11.5 | length 351.3
  Top Layer w10: U9.63@5071.65,1446.06 5071.65,1516.33 5133.61,1578.28 5133.61,1604.68 5230.14,1701.21 5230.5,1701.21 5244.88,1715.59 U11.5@5254.72,1715.59
VCORE: C40.2 C41.2 C42.2 C48.1 C52.2 U9.12 U9.37 U9.49 U9.64 | length 527.7
  Top Layer w10: 4879.74,1155.59 4884.61,1155.59 4885.36,1156.35 4978.79,1156.35 U9.12@4979.13,1156.69 ; 5013.74,1485.59 5019.48,1485.59 5028.57,1476.5 5051.13,1476.5 5051.97,1475.66 U9.64@5051.97,1446.06 ; U9.49@5347.24,1446.06 5370.21,1446.06 5379.74,1455.59 ; U9.37@5420.08,1156.69 5420.42,1156.35 5493.85,1156.35
  Bottom Layer w10: C40.2@4818.15,1145.59 4869.74,1145.59 4879.74,1155.59 ; C42.2@4959.61,1499.13 5000.2,1499.13 5013.74,1485.59 ; 5379.74,1455.59 5389.48,1455.59 5404.48,1470.59 C52.2@5441.06,1470.59 ; 5493.85,1156.35 5494.61,1155.59 C41.2@5546.06,1155.59
pads on no net: IC2.2 IC3.2 IC3.3 IC3.4 IC3.8 IC3.9 IC3.10 IC3.11 IC3.49 IC3.50 IC3.51 IC3.52 J9.A8 J9.B8 P10.4 P10.6 P10.8 SW3. SW4. SW5.2 SW6.1 SW6.4 SW7.1 SW7.4 SW8.1 SW8.4 U1.5 U1.11 U1.17 U4.10 U4.11 U5.6 U5.10 U9.19 U9.22 U9.23 U9.24 U9.26 U9.27 U9.28 U9.32 U9.33 U9.34 U9.36 U9.41 U9.44 U9.45 U9.46 U9.48 U9.52 U9.53 U9.57 U9.58 U9.60 U10.8 U10.10 U10.12 U.5 Y2.2 Y2.4
copper on no net:
  other v3: 13340.8,4546.1

## Polygon pours and split planes (outlines as drawn)
GND on Layer 1 "GND_L02_P000" (solid, pour order 0): 1062.99,4921.26 1062.99,1023.62 7322.83,1023.62 7322.83,4921.26
+3V3 on Layer 2 "+3V3_L03_P001" (solid, pour order 1): 1062.99,4931.1 1062.99,1023.62 7342.52,1023.62 7342.52,4940.94 1062.99,4940.94 1062.99,4931.1

## Silkscreen, mask and mechanical layers (free items; w line width, h text height)
Top Overlay:
  lines w10: 1080,4245 1970,4245 1970,4920 1080,4920 1080,4245 ; 1100,1740 3680,1740 3680,2940 1100,2940 1100,1740 ; 1180,2980 3700,2980 3700,4165 1180,4165 1180,2980 ; 2005,4245 2935,4245 2935,4920 2005,4920 2005,4245 ; 2960,4245 3625,4245 3625,4920 2960,4920 2960,4245 ; 3675,4250 4305,4250 4305,4920 3675,4920 3675,4250 ; 4380,4250 6285,4250 6285,4925 4380,4925 4380,4250 ; 4920,3030 6250,3030 6250,4210 4920,4210 4920,3030 ; 6300,3580 6790,3580 6790,4925 6300,4925 6300,3580 ; 6820,3580 7320,3580 7320,4935 6820,4935 6820,3580
  text "12V" at 4635,4805 h40 r90
  text "12V" at 5020,4800 h40 r90
  text "5V" at 5795,4800 h40 r90
  text "GND" at 4500,4795 h40 r90
  text "GND" at 4890,4795 h40 r90
  text "12V" at 5415,4795 h40 r90
  text "GND" at 5665,4795 h40 r90
  text "3V3" at 6185,4795 h40 r90